# Altium PCB PowerElec.PcbDoc
Units mm, origin at the board's own origin, x right, y up, seen from the top; angles counter-clockwise.
Board outline 178 x 73 mm, 4 copper layers (Top Layer, GND, PWR, Bottom Layer), stack 0.603 mm thick; 119 components, 49 nets, 414 pads, 12 vias.
Unrouted connection lines stored in the file: 339.
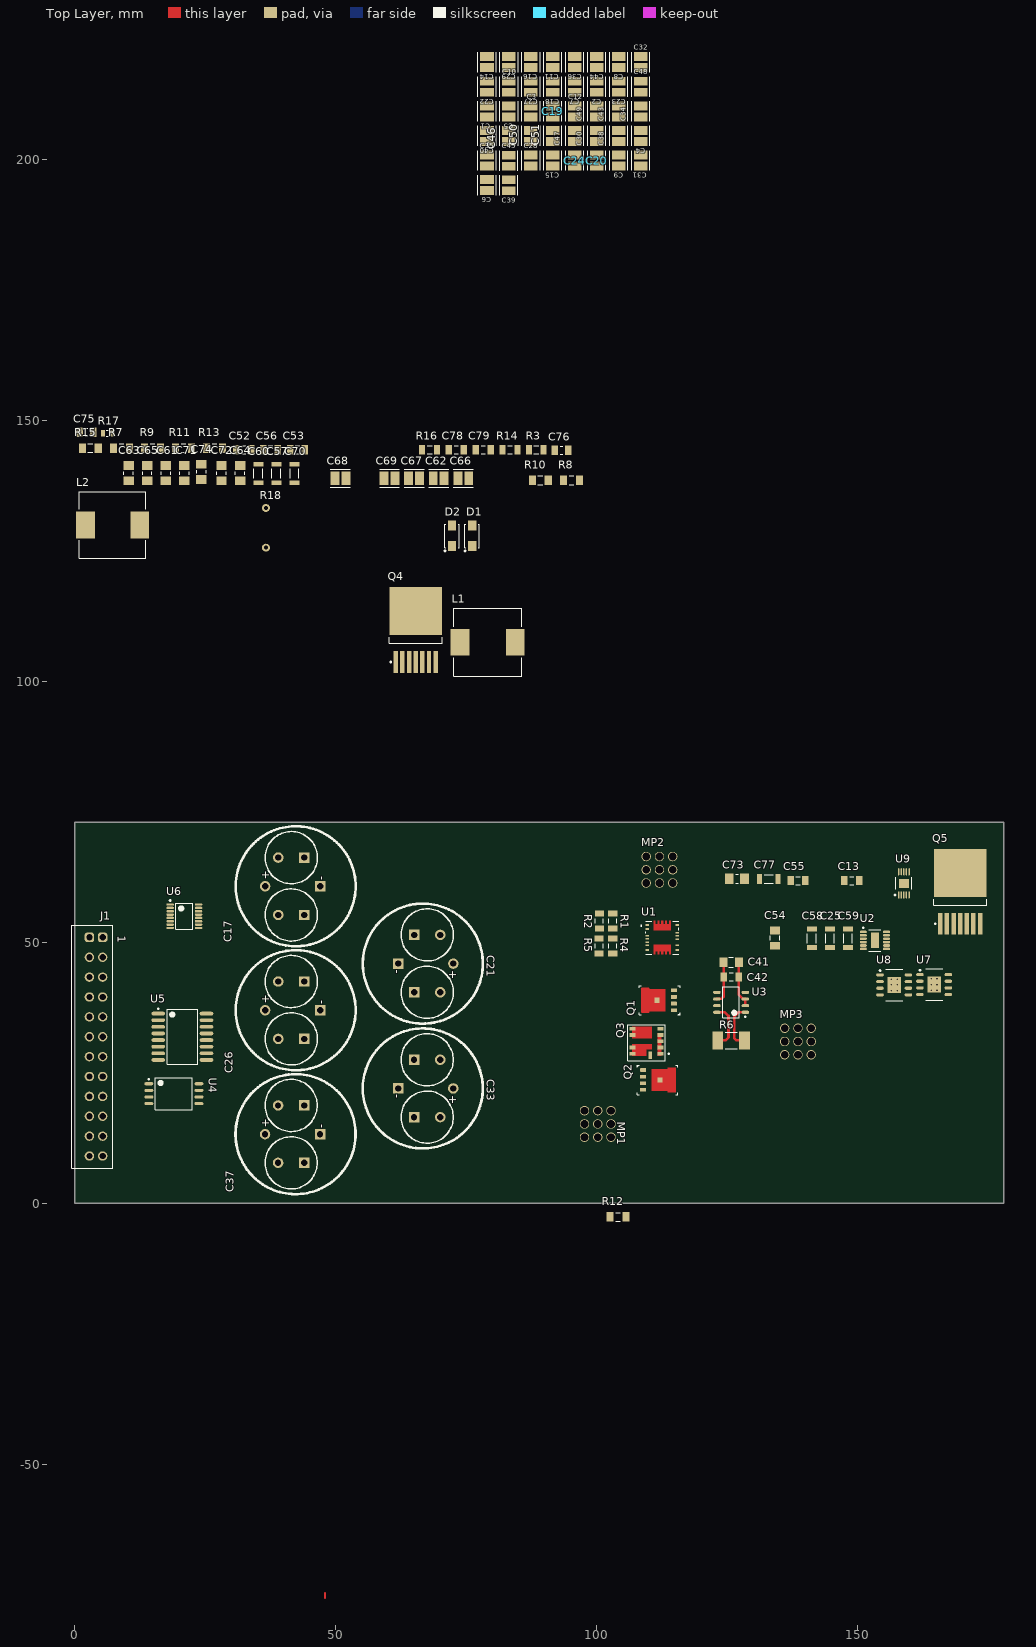
[diagram p0: Top Layer view]
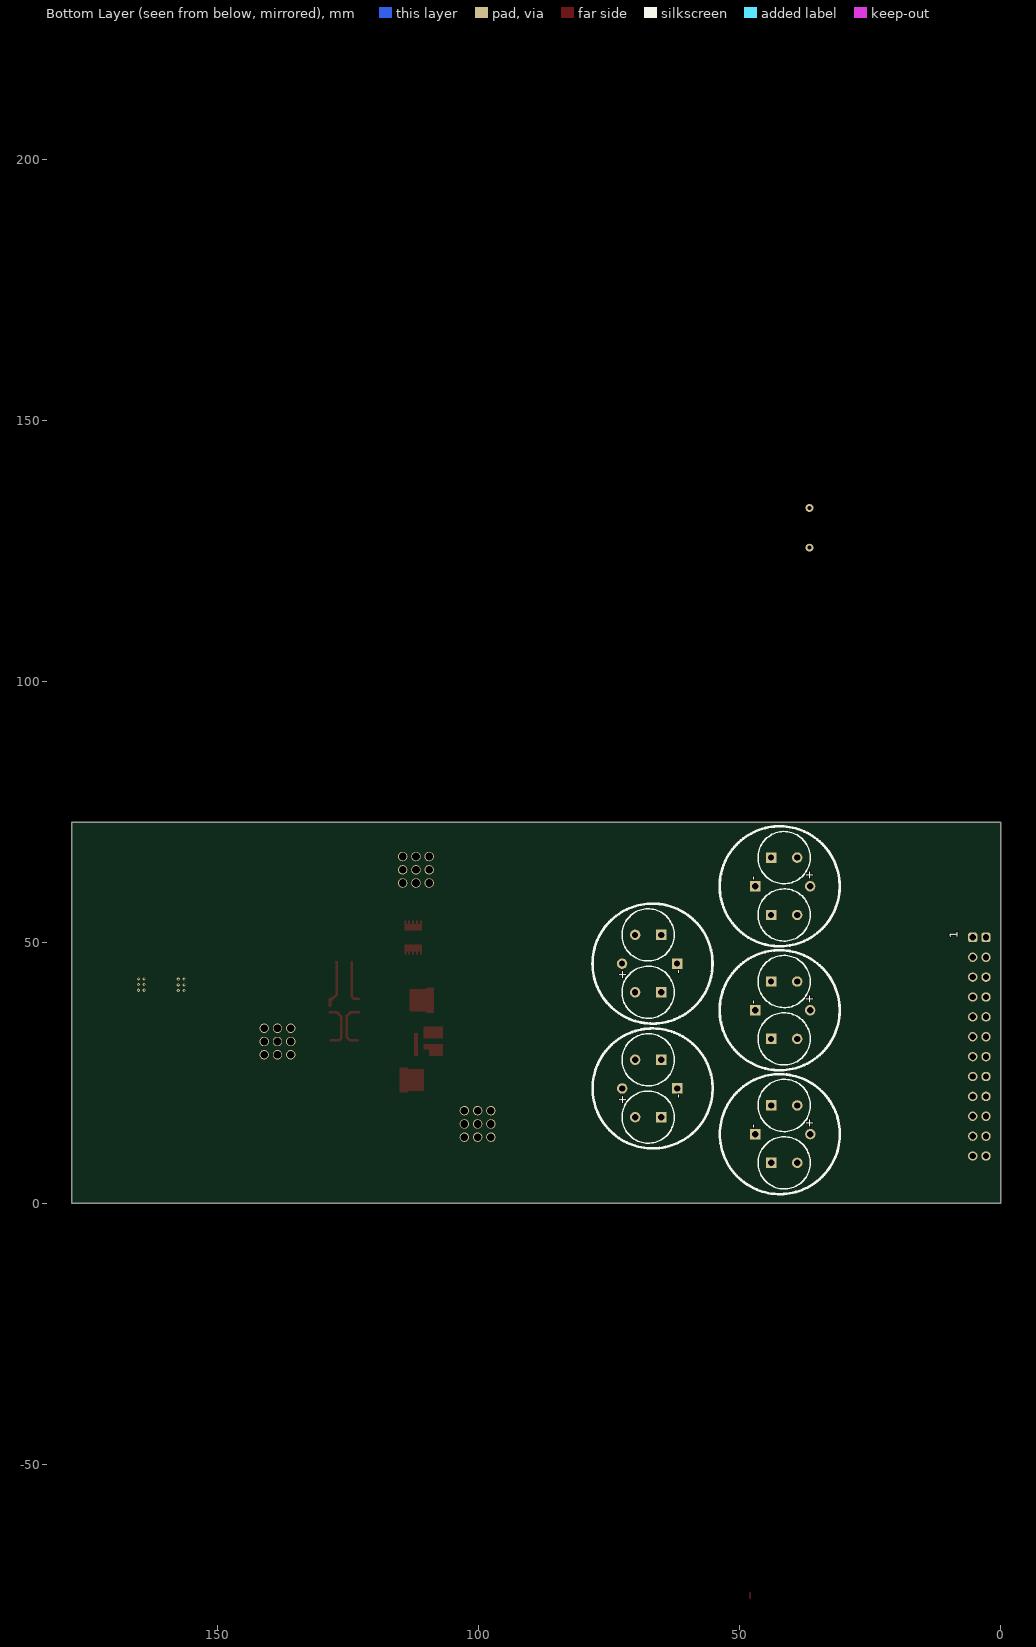
[diagram p1: Bottom Layer view, seen from below]

## Layer stack, top to bottom
Top Solder: solder mask 0.0102, Solder Resist, Dk 3.5
Top Layer: signal copper 0.0356
Dielectric 2: prepreg 0.0711, PP-006, Dk 4.1
GND: signal copper 0.035
Dielectric 1: dielectric 0.32, FR-4, Dk 4.8
PWR: signal copper 0.035
Dielectric 3: prepreg 0.0711, PP-006, Dk 4.1
Bottom Layer: signal copper 0.0356
Bottom Solder: solder mask 0.0102, Solder Resist, Dk 3.5

## Board outline
0,0 0,73 178,73 178,0

## Design rules (kind name [scope] priority, off if disabled: settings)
Clearance [All] p1: gap=0.254 ignorepadtopadclearanceinfootprint=FALSE
PlaneConnect [All] p1: planeconnectstyle=Direct reliefexpansion=0.508 reliefentries=4 reliefconductorwidth=0.254 reliefairgap=0.254
PolygonConnect [All] p1: connectstyle=Direct reliefconductorwidth=0.254 reliefentries=4 polygonreliefangle="90 Angle" airgapwidth=0.254
RoutingVias [All] p1: holewidth=0.711 width=1.27 viastyle="Through Hole" minholewidth=0.711 minwidth=1.27 maxholewidth=0.711 maxwidth=1.27
SolderMaskExpansion [All] p1: expansion=0.102 istentingtop=FALSE
SupplyNets "Schematic Supply Nets_4" [InNet('+11V')] p1: voltage=0.000
SupplyNets "Schematic Supply Nets_9" [InNet('P_IN')] p2: voltage=0.000
SupplyNets "Schematic Supply Nets_7" [InNet('GND ISO')] p3: voltage=0.000
SupplyNets "Schematic Supply Nets_6" [InNet('DGND')] p4: voltage=0.000
SupplyNets "Schematic Supply Nets_5" [InNet('+3V3 ISO')] p5: voltage=0.000
SupplyNets "Schematic Supply Nets_3" [InNet('+3V3')] p6: voltage=0.000
SupplyNets "Schematic Supply Nets_1" [InNet('AGND')] p7: voltage=0.000
SupplyNets "Schematic Supply Nets" [InNet('VBat')] p8: voltage=0.000
Width [All] p1: maxlimit=1 minlimit=0.254 preferedwidth=0.5
29 further rules are at their usual default settings.

## Classes and differential pairs
component class Isolation: C52 C53 C54 C55 C56 C57 C58 C59 C60 R9 R11 R14 R16 R17 U4 U5 U6
component class "Soft Start": C78 C79 D2 Q5 R18 U9
component class "Power Supply": C61 C62 C63 C64 C66 C67 C69 C70 C71 C72 C73 C74 C77 L1 L2 R15 R16 R17 R18 U7 U8
component class "Power Stage": C1 C2 C3 C4 C5 C6 C7 C8 C9 C10 C11 C12 C13 C14 C15 C16 C17 C18 C19 C20 C21 C22 C23 C24 C25 C26 C27 C28 C29 C30 C31 C32 C33 C34 C35 C36 C37 C38 C39 C40 C41 C42 C43 C44 C45 C46 C47 C48 C49 C50 C51 D1 Q1 Q2 Q3 R11 R14 U2 U3
component class PE: J1 MP1 MP2 MP3 R9 R11 R14 R16 U1

## Components (designator, comment, footprint, x,y, rotation, side; value= is the part's Value field where it differs from the comment)
C1 "GCM32EC71H106KA03L" FP-GCM32E-0_3-IPC_C 79.004,209.266 r90 top value=10µF
C2 "GCM32EC71H106KA03L" FP-GCM32E-0_3-IPC_C 100.044,213.978 r90 top value=10µF
C3 "GCM32EC71H106KA03L" FP-GCM32E-0_3-IPC_C 87.42,209.266 r90 top value=10µF
C4 "GCM32EC71H106KA03L" FP-GCM32E-0_3-IPC_C 108.46,204.553 r90 top value=10µF
C5 "GCM32EC71H106KA03L" FP-GCM32E-0_3-IPC_C 83.212,209.266 r90 top value=10µF
C6 "GCM32EC71H106KA03L" FP-GCM32E-0_3-IPC_C 79.004,195.129 r90 top value=10µF
C7 "GCM32EC71H106KA03L" FP-GCM32E-0_3-IPC_C 95.836,213.978 r90 top value=10µF
C8 "GCM32EC71H106KA03L" FP-GCM32E-0_3-IPC_C 104.252,218.69 r90 top value=10µF
C9 "GCM32EC71H106KA03L" FP-GCM32E-0_3-IPC_C 104.252,199.841 r270 top value=10µF
C10 "GCM32EC71H106KA03L" FP-GCM32E-0_3-IPC_C 83.212,213.978 r90 top value=10µF
C11 "GCM32EC71H106KA03L" FP-GCM32E-0_3-IPC_C 91.628,218.69 r90 top value=10µF
C12 "GCM32EC71H106KA03L" FP-GCM32E-0_3-IPC_C 95.836,209.266 r90 top value=10µF
C13 "C1206C104K1RACTU" CAPC3216X06N 148.926,61.841 r0 top value=100nF
C14 "GCM32EC71H106KA03L" FP-GCM32E-0_3-IPC_C 79.004,218.69 r90 top value=10µF
C15 "GCM32EC71H106KA03L" FP-GCM32E-0_3-IPC_C 91.628,199.841 r90 top value=10µF
C16 "GCM32EC71H106KA03L" FP-GCM32E-0_3-IPC_C 87.42,218.69 r90 top value=10µF
C17 "UVR1J472MRD" UVR1J472MRD-Footprint-1 36.5,60.745 r90 top value=4.7mF
C18 "GCM32EC71H106KA03L" FP-GCM32E-0_3-IPC_C 91.628,213.978 r90 top value=10µF
C19 "GCM32EC71H106KA03L" FP-GCM32E-0_3-IPC_C 91.628,209.266 r90 top value=10µF
C20 "GCM32EC71H106KA03L" FP-GCM32E-0_3-IPC_C 100.044,199.841 r270 top value=10µF
C21 "UVR1J472MRD" UVR1J472MRD-Footprint-1 72.556,45.927 r270 top value=4.7mF
C22 "GCM32EC71H106KA03L" FP-GCM32E-0_3-IPC_C 79.004,213.978 r90 top value=10µF
C23 "GCM32EC71H106KA03L" FP-GCM32E-0_3-IPC_C 104.252,213.978 r90 top value=10µF
C24 "GCM32EC71H106KA03L" FP-GCM32E-0_3-IPC_C 95.836,199.841 r270 top value=10µF
C25 "CL31B105KBHNNNE" CAPC3216X180X20ML20 144.738,50.771 r90 top value=1µF
C26 "UVR1J472MRD" UVR1J472MRD-Footprint-1 36.501,36.991 r90 top value=4.7mF
C27 "GCM32EC71H106KA03L" FP-GCM32E-0_3-IPC_C 87.42,213.978 r90 top value=10µF
C28 "GCM32EC71H106KA03L" FP-GCM32E-0_3-IPC_C 87.42,199.841 r90 top value=10µF
C29 "GCM32EC71H106KA03L" FP-GCM32E-0_3-IPC_C 83.212,218.69 r90 top value=10µF
C30 "GCM32EC71H106KA03L" FP-GCM32E-0_3-IPC_C 100.044,204.553 r90 top value=10µF
C31 "GCM32EC71H106KA03L" FP-GCM32E-0_3-IPC_C 108.46,199.841 r90 top value=10µF
C32 "GCM32EC71H106KA03L" FP-GCM32E-0_3-IPC_C 108.46,218.69 r90 top value=10µF
C33 "UVR1J472MRD" UVR1J472MRD-Footprint-1 72.541,22 r270 top value=4.7mF
C34 "GCM32EC71H106KA03L" FP-GCM32E-0_3-IPC_C 108.46,209.266 r90 top value=10µF
C35 "GCM32EC71H106KA03L" FP-GCM32E-0_3-IPC_C 79.004,199.841 r90 top value=10µF
C36 "GCM32EC71H106KA03L" FP-GCM32E-0_3-IPC_C 95.836,218.69 r90 top value=10µF
C37 "UVR1J472MRD" UVR1J472MRD-Footprint-1 36.472,13.237 r90 top value=4.7mF
C38 "GCM32EC71H106KA03L" FP-GCM32E-0_3-IPC_C 104.252,204.553 r90 top value=10µF
C39 "GCM32EC71H106KA03L" FP-GCM32E-0_3-IPC_C 83.2,195.1 r270 top value=10µF
C40 "GCM32EC71H106KA03L" FP-GCM32E-0_3-IPC_C 79.004,204.553 r90 top value=10µF
C41 "CL31B102KGFNNNE" FP-CL31-IPC_A 125.8,46.2 r0 top value=1nF
C42 "C1206C104K1RACTU" CAPC3216X06N 125.8,43.367 r0 top value=100nF
C43 "GCM32EC71H106KA03L" FP-GCM32E-0_3-IPC_C 104.252,209.266 r90 top value=10µF
C44 "GCM32EC71H106KA03L" FP-GCM32E-0_3-IPC_C 100.044,218.69 r90 top value=10µF
C45 "GCM32EC71H106KA03L" FP-GCM32E-0_3-IPC_C 83.2,199.8 r270 top value=10µF
C46 "GCM32EC71H106KA03L" FP-GCM32E-0_3-IPC_C 83.212,204.553 r90 top value=10µF
C47 "GCM32EC71H106KA03L" FP-GCM32E-0_3-IPC_C 95.836,204.553 r90 top value=10µF
C48 "GCM32EC71H106KA03L" FP-GCM32E-0_3-IPC_C 108.46,213.978 r90 top value=10µF
C49 "GCM32EC71H106KA03L" FP-GCM32E-0_3-IPC_C 100.044,209.266 r90 top value=10µF
C50 "GCM32EC71H106KA03L" FP-GCM32E-0_3-IPC_C 87.42,204.553 r90 top value=10µF
C51 "GCM32EC71H106KA03L" FP-GCM32E-0_3-IPC_C 91.628,204.553 r90 top value=10µF
C52 "C1206C104K1RACTU" CAPC3216X06N 32.369,144.411 r0 top value=100nF
C53 "C1206C104K1RACTU" CAPC3216X06N 42.685,144.411 r0 top value=100nF
C54 "CL31B102KGFNNNE" FP-CL31-IPC_A 134.202,50.825 r90 top value=1nF
C55 "C1206C104K1RACTU" CAPC3216X06N 138.61,61.841 r0 top value=100nF
C56 "C1206C104K1RACTU" CAPC3216X06N 37.527,144.411 r0 top value=100nF
C57 "CL31B105KBHNNNE" CAPC3216X180X20ML20 38.651,139.853 r90 top value=1µF
C58 "CL31B105KBHNNNE" CAPC3216X180X20ML20 141.28,50.771 r90 top value=1µF
C59 "CL31B105KBHNNNE" CAPC3216X180X20ML20 148.196,50.771 r90 top value=1µF
C60 "CL31B105KBHNNNE" CAPC3216X180X20ML20 35.193,139.853 r90 top value=1µF
C61 "CL31B104KBCNNNC" CAPC3216X190X55ML30T25 17.453,139.903 r90 top value=100nF
C62 "GCM32EC71H106KA03L" FP-GCM32E-0_3-IPC_C 69.755,138.928 r0 top value=10µF
C63 "CL31B104KBCNNNC" CAPC3216X190X55ML30T25 10.337,139.903 r90 top value=100nF
C64 "CL31B104KBCNNNC" CAPC3216X190X55ML30T25 31.685,139.903 r90 top value=100nF
C65 "CL31B104KBCNNNC" CAPC3216X190X55ML30T25 13.895,139.903 r90 top value=100nF
C66 "GCM32EC71H106KA03L" FP-GCM32E-0_3-IPC_C 74.467,138.928 r0 top value=10µF
C67 "GCM32EC71H106KA03L" FP-GCM32E-0_3-IPC_C 65.043,138.928 r0 top value=10µF
C68 "GCM32EC71H106KA03L" FP-GCM32E-0_3-IPC_C 50.906,138.928 r0 top value=10µF
C69 "GCM32EC71H106KA03L" FP-GCM32E-0_3-IPC_C 60.331,138.928 r0 top value=10µF
C70 "CL31B105KBHNNNE" CAPC3216X180X20ML20 42.109,139.853 r90 top value=1µF
C71 "CL31B104KBCNNNC" CAPC3216X190X55ML30T25 21.011,139.903 r90 top value=100nF
C72 "CL31B104KBCNNNC" CAPC3216X190X55ML30T25 28.127,139.903 r90 top value=100nF
C73 "CL31B104KBCNNNC" CAPC3216X190X55ML30T25 126.894,62.191 r0 top value=100nF
C74 "CL31B104KBCNNNC" CAPC3216X190X55ML30T25 24.265,140.181 r90 top value=100nF
C75 "CL31A476MPHNNNE" CAPC3216X190X55LL30T25 2.279,147.769 r0 top value=47µF
C76 "CL31A476MPHNNNE" CAPC3216X190X55LL30T25 93.265,144.311 r0 top value=47µF
C77 "CL31B105KBHNNNE" CAPC3216X180X20ML20 133.002,62.141 r0 top value=1µF
C78 "C1206C104K1RACTU" CAPC3216X06N 73.133,144.411 r0 top value=100nF
C79 "C1206C104K1RACTU" CAPC3216X06N 78.291,144.411 r0 top value=100nF
D1 "SS210" DIOM4226X24N 76.161,127.92 r90 top
D2 "SS210" DIOM4226X24N 72.303,127.92 r90 top
J1 "691309310012" 691309310012 0,30 r270 top
L1 "SRR1208-220ML" INDP127127X85N 79.136,107.537 r0 top value=22µH
L2 "SRR1260A-5R6Y" INDP125125X60N 7.252,130 r0 top value=5.6µH
MP1 "7461001" "7461001_chemical surface" 100.24,15.2 r0 top
MP2 "7461001" "7461001_chemical surface" 112.06,63.9 r0 top
MP3 "7461001" "7461001_chemical surface" 138.6,31 r0 top
Q1 "PSMN1R0-30YLDX" NXP-SOT669_L 114.894,36.995 r180 top
Q2 "PSMN1R0-30YLDX" NXP-SOT669_L 108.868,25.526 r0 top
Q3 "ISG0613N04NM6H" IFX-PG-VITFN-10-1-V 109.6,30.9 r180 top
Q4 "IPB014N06NATMA1" INF-PG-TO263-7-1_M 65.349,109.865 r90 top
Q5 "IPB014N06NATMA1" INF-PG-TO263-7-1_M 169.7,59.7 r90 top
R1 "1206W4F0000T5E" RESC3216X60X45NL15T20 103.1,54.079 r90 top value=0
R2 "1206W4F0000T5E" RESC3216X60X45NL15T20 100.546,54.079 r90 top value=0
R3 "1206W4F0000T5E" RESC3216X60X45NL15T20 88.457,144.411 r0 top value=0
R4 "1206W4F0000T5E" RESC3216X60X45NL15T20 103.1,49.3 r90 top value=0
R5 "1206W4F0000T5E" RESC3216X60X45NL15T20 100.5,49.3 r90 top value=0
R6 "CHSA2512R0010F" RESC6331X09N 125.8,31.2 r0 top value=1m
R7 "1206W4F1002T5E" RESC3216X60X45ML15T20 8.937,144.711 r0 top value=10k
R8 "1206W4F1002T5E" RESC3216X60X45ML15T20 95.184,138.553 r0 top value=10k
R9 "1206W4F1002T5E" RESC3216X60X45ML15T20 14.895,144.711 r0 top value=10k
R10 "1206W4F1002T5E" RESC3216X60X45ML15T20 89.226,138.553 r0 top value=10k
R11 "1206W4F1002T5E" RESC3216X60X45ML15T20 20.853,144.711 r0 top value=10k
R12 "1206W4F1002T5E" RESC3216X60X45ML15T20 104.1,-2.604 r0 top value=10k
R13 "1206W4F1002T5E" RESC3216X60X45ML15T20 26.811,144.711 r0 top value=10k
R14 "1206W4F1003T5E" RESC3216X60X45NL15T20 83.399,144.411 r0 top value=100k
R15 "1206W4F1002T5E" RESC3216X60X45ML15T20 2.979,144.711 r0 top value=10k
R16 "1206W4F1003T5E" RESC3216X60X45NL15T20 68.025,144.411 r0 top value=100k
R17 "0805W8F4302T5E" RESC0805(2012)_L 6.337,147.569 r0 top value=43k
R18 "RS2B-10 OHM-5%" "RS2B-10 OHM-5%-Footprint-1" 36.642,125.634 r0 top value=10
U1 "INA780BIDEKR" VQFN15_DEK_TEX 112.6,50.9 r0 top
U2 "LTC7063RMSE#PBF" TSOP65P490X110_HS-13N 153.354,50.371 r0 top
U3 "AD8411AWBRZ" SOIC127P600X175-8N 125.8,38.5 r180 top
U4 "ADUM1252AWA+" SOIC127P1030X265-8N 19,21 r0 top
U5 "ADUM1411BRWZ" ADI-RW-16_M 20.625,31.905 r0 top
U6 "ADUM3190BRQZ" SOP64P600X175-16N 21,55 r0 top
U7 "LMR33630ADDAR" SOIC127P600X170_HS-9N 164.708,41.907 r0 top
U8 "LMR33630ADDAR" SOIC127P600X170_HS-9N 157.054,41.845 r0 top
U9 "LTC7004EMSE#PBF" TSSOP50P490X110_HS-11N 158.9,61.3 r90 top

## Footprints (in the part's own frame and the unit in brackets; to place one, negate y for a bottom-side part, rotate by r counter-clockwise, add the part's x,y. Pads: shape width x height; smd on the part's side, far side on the other; paste and mask are expansions set on the pad)
"7461001_chemical surface" [mm] "M5, thread 8mm"
  round 1.8 hole 1.475: 1(-2.54,-2.54) 1(-2.54,0) 1(-2.54,2.54) 1(0,-2.54) 1(0,0) 1(0,2.54) 1(2.54,-2.54) 1(2.54,0) 1(2.54,2.54)
  body extent -3.5,-3.5 3.5,3.5, height 12
691309310012 [mm] "Horizontal Reserved PCB Header, pitch 3.81mm, 12p"
  rrect50% 1.8x1.8 hole 1.2: 1A(-20.955,5.35) 1B(-20.955,2.81)
  round 1.8 hole 1.2: 2A(-17.145,5.35) 2B(-17.145,2.81) 3A(-13.335,5.35) 3B(-13.335,2.81) 4A(-9.525,5.35) 4B(-9.525,2.81) 5A(-5.715,5.35) 5B(-5.715,2.81) 6A(-1.905,5.35) 6B(-1.905,2.81) 7A(1.905,5.35) 7B(1.905,2.81) 8A(5.715,5.35) 8B(5.715,2.81) 9A(9.525,5.35) 9B(9.525,2.81) 10A(13.335,5.35) 10B(13.335,2.81) 11A(17.145,5.35) 11B(17.145,2.81) 12A(20.955,5.35) 12B(20.955,2.81)
  silkscreen extent -23.26,-0.55 23.26,7.25, body extent -23.01,-7.25 23.5,7.25, height 6.85
ADI-RW-16_M [mm] "SOIC, 16-Leads, Body 10.3x7.5mm, Pitch 1.27mm, IPC Low Density"
  oval 2.6x0.7 smd: 1(-4.625,4.445) 2(-4.625,3.175) 3(-4.625,1.905) 4(-4.625,0.635) 5(-4.625,-0.635) 6(-4.625,-1.905) 7(-4.625,-3.175) 8(-4.625,-4.445) 9(4.625,-4.445) 10(4.625,-3.175) 11(4.625,-1.905) 12(4.625,-0.635) 13(4.625,0.635) 14(4.625,1.905) 15(4.625,3.175) 16(4.625,4.445)
  silkscreen extent -4.75,-5.25 2.93,5.47, body extent -3.8,-5.25 3.8,5.25, height 2.65
CAPC3216X06N [mm] "Chip Capacitor, 2-Leads, Body 3.20x1.60mm, IPC Medium Density"
  rect 1.25x1.75 smd: 1(-1.425,0) 2(1.425,0)
  silkscreen extent -0.4,-0.77 0.4,0.77, body extent -1.65,-0.85 1.65,0.85, height 0.6
CAPC3216X180X20ML20 [mm] "Chip Capacitor, 2-Leads, Body 3.40x1.80mm, IPC Low Density"
  rect 0.95x1.9 smd: 1(-1.775,0) 2(1.775,0)
  silkscreen extent -0.9,-0.85 0.9,0.85, body extent -1.7,-0.9 1.7,0.9, height 1.8
CAPC3216X190X55LL30T25 [mm] "Chip Capacitor, 2-Leads, Body 3.5x1.9mm, IPC High Density"
  rect 1.25x1.8 smd: 1(-1.275,0) 2(1.275,0)
  silkscreen extent -0.25,-0.8 0.25,0.8, body extent -1.75,-0.95 1.75,0.95, height 1.9
CAPC3216X190X55ML30T25 [mm] "Chip Capacitor, 2-Leads, Body 3.5x1.9mm, IPC Low Density"
  rect 1.65x2 smd: 1(-1.475,0) 2(1.475,0)
  silkscreen extent -0.25,-0.9 0.25,0.9, body extent -1.75,-0.95 1.75,0.95, height 1.9
DIOM4226X24N [mm] "Molded Diode, 2-Leads, Body 4.15x2.55mm, IPC Medium Density"
  rect 2x1.6 smd: 1(-1.965,0) 2(1.965,0)
  silkscreen extent -3.02,-1.4 2.25,1.47, body extent -2.47,-1.4 2.47,1.4, height 2.44
FP-CL31-IPC_A [mm]
  rect 1.505x1.858 smd paste+0 mask+0: 1(-1.476,0) 2(1.476,0)
  silkscreen extent -0.42,-0.93 0.42,0.93, body extent -2.73,-1.43 2.73,1.43, height 0.25
FP-GCM32E-0_3-IPC_C [mm]
  rect 1.703x2.606 smd paste+0 mask+0: 1(-1.051,0) 2(1.051,0)
  silkscreen extent -1.9,-1.75 1.9,1.75, body extent -2,-1.45 2,1.45, height 0.25
IFX-PG-VITFN-10-1-V [mm] "PG-VITFN-10-1, SMD, 1.20 mm pitch, 10 pin, 6.00 mm L X 6.30 mm W X 1.00 mm H body"
  rect 1.15x0.7 smd paste-0.575 mask+0: 1(-2.675,2.25) 2(-2.675,1.05) 3(-2.675,-0.15) 4(-2.675,-1.35) 5(-2.675,-2.55) 6(2.675,-2.55) 7(2.675,-1.35) 8(2.675,1.05) 9(2.675,2.25)
  rect 0.6x1.4 smd paste-0.06 mask+0: 10(-0.7,2.55)
  Top Layer region: -2.8,-1.7 -2.1,-1.7 -2.1,2.6 -2.8,2.6
  Top Layer region: -1,-2.9 2.705,-2.9 2.705,-0.7 -1,-0.7
  Top Layer region: -1,0.4 2.705,0.4 2.705,2.6 0.085,2.6 0.085,1.4 -1,1.4
  silkscreen extent -4.38,-3.3 3.6,3.6, body extent -3,-3.3 3,3, height 1
INDP125125X60N [mm] "Precision Wire Wound Inductor, 2-Leads, Body 12.50x12.50mm, IPC Medium Density"
  rect 3.6x5.15 smd: 1(-5.2,0) 2(5.2,0)
  silkscreen extent -6.4,-6.4 6.4,6.4, body extent -6.35,-6.25 6.35,6.25, height 6.1
INDP127127X85N [mm] "Precision Wire Wound Inductor, 2-Leads, Body 12.70x12.70mm, IPC Medium Density"
  rect 3.6x5.1 smd: 1(-5.3,0) 2(5.3,0)
  silkscreen extent -6.5,-6.5 6.5,6.5, body extent -6.45,-6.35 6.45,6.35, height 8.6
INF-PG-TO263-7-1_M [mm] "DPAK, 8-Leads, Body 10x9.25mm, Pitch 1.27mm, IPC Low Density"
  rect 4.15x0.85 smd: 1(-6.15,3.81) 2(-6.15,2.54) 3(-6.15,1.27) 4(-6.15,0) 5(-6.15,-1.27) 6(-6.15,-2.54) 7(-6.15,-3.81)
  rect 9.2x10.1 smd: 8(3.6,0)
  silkscreen extent -6.27,-5.1 -1.4,5.1, body extent -2.55,-5.1 6.9,5.1, height 4.4
NXP-SOT669_L [mm] "DPAK, 4-Leads, Body 5x4.1mm, Pitch 1.27mm, IPC High Density"
  rrect25% 1.15x0.7 smd: 1(0.069,0) 2(0.069,-1.27) 3(0.069,-2.54) 4(0.069,-3.81)
  rrect0% 1x1 smd paste-1: 5(3.294,-1.905)
  Top Layer region: 1.694,0.095 1.694,-3.905 1.694,-3.925 1.709,-3.962 1.737,-3.99 1.774,-4.005 1.794,-4.005 1.794,-4.005 4.694,-4.005 4.713,-4.007 4.75,-4.022 4.777,-4.049 4.792,-4.085 4.794,-4.105 4.794,-4.105 4.794,-4.155 4.794,-4.175 4.809,-4.212 4.837,-4.24 4.874,-4.255 4.894,-4.255 4.894,-4.255 6.194,-4.255 6.214,-4.255 6.251,-4.24 6.279,-4.212 6.294,-4.175 6.294,-4.155 6.294,-4.155 6.294,0.345 6.294,0.365 6.279,0.402 6.251,0.43 6.214,0.445 6.194,0.445 6.194,0.445 4.894,0.445 4.874,0.445 4.837,0.43 4.809,0.402 4.794,0.365 4.794,0.345 4.794,0.345 4.794,0.295 4.792,0.275 4.777,0.239 4.75,0.212 4.714,0.197 4.694,0.195 4.694,0.195 1.794,0.195 1.774,0.195 1.737,0.18 1.709,0.152 1.694,0.115 1.694,0.095
  silkscreen extent -1.11,-4.7 6.69,0.89, body extent -0.43,-4.35 5.99,0.55, height 1.1
RESC0805(2012)_L [mm] "Chip Resistor, Body 2.0x1.3mm, IPC High Density"
  rrect25% 0.76x1.3 smd: 1(-0.9,0) 2(0.89,0)
  silkscreen extent -0.3,-0.55 0.3,0.55, body extent -1,-0.62 1,0.63, height 0.6
RESC3216X60X45ML15T20 [mm] "Chip Resistor, 2-Leads, Body 3.3x1.75mm, IPC Low Density"
  rect 1.35x1.85 smd: 1(-1.525,0) 2(1.525,0)
  silkscreen extent -0.45,-0.82 0.45,0.82, body extent -1.65,-0.87 1.65,0.87, height 0.6
RESC3216X60X45NL15T20 [mm] "Chip Resistor, 2-Leads, Body 3.3x1.75mm, IPC Medium Density"
  rect 1.15x1.75 smd: 1(-1.425,0) 2(1.425,0)
  silkscreen extent -0.45,-0.77 0.45,0.77, body extent -1.65,-0.87 1.65,0.87, height 0.6
RESC6331X09N [mm] "Chip Resistor, 2-Leads, Body 6.30x3.10mm, IPC Medium Density"
  rect 2.05x3.4 smd: 1(-2.575,0) 2(2.575,0)
  silkscreen extent -1.15,-1.6 1.15,1.6, body extent -3.17,-1.58 3.32,1.52, height 0.92
"RS2B-10 OHM-5%-Footprint-1" [mil]
  round 60 hole 30: 1(0,0) 2(0,300)
SOIC127P600X170_HS-9N [mm] "SOIC, 8-Leads, Body 5.40x3.90mm, Pitch 1.27mm, Thermal Pad 3.10x2.60mm, IPC Medium Density"
  oval 1.45x0.6 smd: 1(-2.725,1.905) 2(-2.725,0.635) 3(-2.725,-0.635) 4(-2.725,-1.905) 5(2.725,-1.905) 6(2.725,-0.635) 7(2.725,0.635) 8(2.725,1.905)
  rect 2.6x3.1 smd: 9(0,0)
  silkscreen extent -2.85,-3 1.6,3, body extent -3,-3 3,3, height 1.7
SOIC127P600X175-8N [mm] "SOIC, 8-Leads, Body 5.40x3.90mm, Pitch 1.27mm, IPC Medium Density"
  oval 1.45x0.6 smd: 1(-2.725,1.905) 2(-2.725,0.635) 3(-2.725,-0.635) 4(-2.725,-1.905) 5(2.725,-1.905) 6(2.725,-0.635) 7(2.725,0.635) 8(2.725,1.905)
  silkscreen extent -2.85,-3 1.6,3, body extent -3,-3 3,3, height 1.75
SOIC127P1030X265-8N [mm] "SOIC, 8-Leads, Body 5.85x7.50mm, Pitch 1.27mm, IPC Medium Density"
  oval 1.7x0.6 smd: 1(-4.8,1.905) 2(-4.8,0.635) 3(-4.8,-0.635) 4(-4.8,-1.905) 5(4.8,-1.905) 6(4.8,-0.635) 7(4.8,0.635) 8(4.8,1.905)
  silkscreen extent -4.92,-3.05 3.55,3.05, body extent -5.16,-3.05 5.16,3.05, height 2.65
SOP64P600X175-16N [mm] "SOP, 16-Leads, Body 4.90x3.91mm, Pitch 0.64mm, IPC Medium Density"
  oval 1.45x0.45 smd: 1(-2.725,2.24) 2(-2.725,1.6) 3(-2.725,0.96) 4(-2.725,0.32) 5(-2.725,-0.32) 6(-2.725,-0.96) 7(-2.725,-1.6) 8(-2.725,-2.24) 9(2.725,-2.24) 10(2.725,-1.6) 11(2.725,-0.96) 12(2.725,-0.32) 13(2.725,0.32) 14(2.725,0.96) 15(2.725,1.6) 16(2.725,2.24)
  silkscreen extent -2.85,-2.5 1.6,3.14, body extent -3,-2.5 3,2.5, height 1.75
TSOP65P490X110_HS-13N [mm] "TSOP, 12-Leads, Body 4.04x3.00mm, Pitch 0.65mm, Thermal Pad 2.95x1.55mm, IPC Medium Density"
  oval 1.35x0.5 smd: 1(-2.225,1.625) 2(-2.225,0.975) 3(-2.225,0.325) 4(-2.225,-0.325) 5(-2.225,-0.975) 6(-2.225,-1.625) 7(2.225,-1.625) 8(2.225,-0.975) 9(2.225,-0.325) 10(2.225,0.325) 11(2.225,0.975) 12(2.225,1.625)
  rect 1.55x2.95 smd: 13(0,0)
  silkscreen extent -2.35,-2.05 1.15,2.55, body extent -2.45,-2.05 2.45,2.05, height 1.1
TSSOP50P490X110_HS-11N [mm] "TSSOP, 10-Leads, Body 3.00x3.00mm, Pitch 0.50mm, Thermal Pad 1.88x1.68mm, IPC Medium Density"
  oval 1.35x0.3 smd: 1(-2.225,1) 2(-2.225,0.5) 3(-2.225,0) 4(-2.225,-0.5) 5(-2.225,-1) 6(2.225,-1) 7(2.225,-0.5) 8(2.225,0) 9(2.225,0.5) 10(2.225,1)
  rect 1.68x1.88 smd: 11(0,0)
  silkscreen extent -2.35,-1.55 1.15,1.82, body extent -2.45,-1.55 2.45,1.55, height 1.1
UVR1J472MRD-Footprint-1 [mm]
  round 2 hole 1.2: 1(-5.5,-2.5) 1(0,0) 1(5.5,-2.5)
  rect 2x2 hole 1.2: 2(-5.5,-7.5) 2(0,-10.541) 2(5.5,-7.5)
  silkscreen extent -11.5,-17.34 11.5,5.65, body extent -11.5,-17.5 11.5,5.5, height 50
VQFN15_DEK_TEX [mil]
  rect 28x16 smd paste+0 mask+0: 1(-112.2,94.49) 7(-112.2,-94.49) 9(112.2,-94.49) 14(112.2,94.49)
  rect 28x12 smd paste+0 mask+0: 2(-112.2,64.96) 3(-112.2,13.78) 4(-112.2,-9.84) 5(-112.2,-33.46) 6(-112.2,-57.09) 10(112.2,-57.09) 11(112.2,-11.81) 12(112.2,13.78) 13(112.2,37.4)
  round 1 smd: 8(0,-90.74) 15(0,90.74)
  Top Layer region: 0,-23.5 0,-23.5 0,-23.5 0,-23.5 0,-23.5 0,-23.5 0,-23.5 0,-23.5
  Top Layer region: 0,23.5 0,23.5 0,23.5 0,23.5 0,23.5 0,23.5 0,23.5 0,23.5
  Top Layer region: -53,126.24 -65,126.24 -65,55.24 65,55.24 65,126.24 53,126.24 53,102.24 35.53,102.24 35.53,126.24 23.53,126.24 23.53,102.24 6,102.24 6,126.24 -6,126.24 -6,102.24 -23.53,102.24 -23.53,126.24 -35.53,126.24 -35.53,102.24 -53,102.24
  Top Layer region: 65,-55.24 -65,-55.24 -65,-126.24 -53,-126.24 -53,-102.24 -35.53,-102.24 -35.53,-126.24 -23.53,-126.24 -23.53,-102.24 -6,-102.24 -6,-126.24 6,-126.24 6,-102.24 23.53,-102.24 23.53,-126.24 35.53,-126.24 35.53,-102.24 53,-102.24 53,-126.24 65,-126.24
  silkscreen extent -164,-125 125,125, body extent -118,-118 118,118, height 39

## Part data
C1 C2 C3 C4 C5 C6 C7 C8 C9 C10 C11 C12 C14 C15 C16 C18 C19 C20 C22 C23 C24 C27 C28 C29 C30 C31 C32 C34 C35 C36 C38 C39 C40 C43 C44 C45 C46 C47 C48 C49 C50 C51 C62 C66 C67 C68 C69: library part CMP-001-00085-1, "50V 10uF X7S ±10% 1210 Multilayer Ceramic Capacitors MLCC - SMD/SMT ROHS", Case Code (Metric)=3225, Case/Package=1210, Dielectric=X7S, Max Operating Temperature=125°C, Min Operating Temperature=-55°C, Tolerance=10%, Voltage Rating=50V, Mounting Technology="Surface Mount"
C13 C42 C52 C53 C55 C56 C78 C79: library part CMP-001-00083-1, "Ceramic Capacitor, Multilayer, Ceramic, 200V, 10% +Tol, 10% -Tol, X7R, 15% TC, 0.01uF, 1206", Case/Package=1206, Max Operating Temperature=125°C, Min Operating Temperature=-55°C, Tolerance=10%, Voltage Rating=100V, Mounting Technology="Surface Mount", Pins=2
C17 C21 C26 C33 C37: library part CMP-001-00084-4, "Radial Can ALUMINUM ELECTROLYTIC CAPACITOR UVR 63V 4700muF ±20% 0.866Dia 22.00mm", Case/Package=Radial, Max Operating Temperature=85°C, Min Operating Temperature=-40°C, Ripple Current=3.2A, Tolerance=20%, Voltage Rating=63V, Mounting Technology="Through Hole", Pins=2
C25 C57 C58 C59 C60 C70 C77: library part CMP-001-00086-1, "Ceramic Capacitor, Multilayer, Ceramic, 50V, 10% +Tol, 10% -Tol, X7R, +-15% TC, 1uF, Surface Mount, 1206 inch", Case/Package=1206, JLCPN=C1848, Max Operating Temperature=125°C, Min Operating Temperature=-55°C, Tolerance=10%, Voltage Rating=50V, Mounting Technology="Surface Mount"
C41 C54: library part CMP-001-00090-1, "Ceramic Capacitor, Multilayer, Ceramic, 500V, 10% +Tol, 10% -Tol, X7R, +-15% TC, 1nF, Surface Mount, 1206 inch", Case/Package=1206, Max Operating Temperature=125°C, Min Operating Temperature=-55°C, Tolerance=10%, Voltage Rating=500V, Mounting Technology="Surface Mount"
C61 C63 C64 C65 C71 C72 C73 C74: library part CMP-001-00089-1, "50V 100nF X7R ±10% 1206 Multilayer Ceramic Capacitors MLCC - SMD/SMT ROHS", Case/Package=1206, JLCPN=C24497, Max Operating Temperature=125°C, Min Operating Temperature=-55°C, Tolerance=10%, Voltage Rating=50V, Mounting Technology="Surface Mount"
C75 C76: library part CMP-001-00087-1, "Ceramic Capacitor, Multilayer, Ceramic, 10V, 20% +Tol, 20% -Tol, X5R, +-15% TC, 47uF, Surface Mount, 1206 inch", Case/Package=1206, JLCPN=C96123, Max Operating Temperature=85°C, Min Operating Temperature=-55°C, Tolerance=20%, Voltage Rating=10V, Mounting Technology="Surface Mount"
D1 D2: library part CMP-004-00033-2, "Rectifier Diode, Schottky, 1 Phase, 1 Element, 2A, 100V V(RRM), Silicon, DO-214AA", Case/Package=SMB, Forward Current=2A, Forward Voltage=850mV, JLCPN=C14996, Max Operating Temperature=150°C, Min Operating Temperature=-65°C, Pins=2
J1: library part CMP-002-00074-2, "Terminal Block, 3.81MM Pitch, Horizontal With Coding Finger, Tht, 12 Pins", Gender=Female, System=Connector
L1: library part CMP-006-00022-1, "Inductor Power Shielded Wirewound 22uH 20% 1KHz 23Q-Factor Ferrite 3.5A 0.043Ohm DCR T/R", Case/Package=5050, Current Rating=3.5A, JLCPN=C2041332, Max Operating Temperature=125°C, Min Operating Temperature=-40°C, Self Resonant Frequency=7MHz, Tolerance=20%, Max Current Rating=3.5A, Mounting Technology="Surface Mount", Pins=2
L2: library part CMP-006-00023-1, "Ind Power Shielded Wirewound 5.6uH 30% 100KHz 19Q-Factor Ferrite 6.7A T/R", Case/Package=Nonstandard, Current Rating=6.7A, DC Resistance (DCR)=16.2mΩ, JLCPN=C2042812, Max Operating Temperature=125°C, Min Operating Temperature=-40°C, Self Resonant Frequency=33MHz, Tolerance=30%, Max Current Rating=6.7A, Mounting Technology="Surface Mount"
MP1 MP2 MP3: library part CMP-002-00075-1, "Pcb Terminal, Brass, Press-Fit Rohs Compliant: Yes", Current Rating=130A, Max Operating Temperature=150°C, Min Operating Temperature=-55°C, Height=12mm, Material=Brass, Pins=9
Q1 Q2: library part CMP-013-00029-7, "N-channel Logic Level MOSFET, 30 V, 300 A, -55 to 175 degC, 5-Pin SOT669, RoHS, Tape and Reel", Pins=5, RoHS Compliant=True, Transistor Type=1N-Channel, Vgs (Max)=20V
Q3: library part CMP-007-000000-2, "Small Signal Dual N-Channel Enhancement Transistor, Pin 1 Source, 2 Source, 3 Drain, 4 Drain, 5 Gate, 6 Drain, 7 Drain, 8 Source, 9 Source 10 Gate, 10 Pins", Manufacturer="Infineon Technologies", Design Item ID=ISG0613N04NM6H, Manufacturer Order Number=ISG0613N04NM6H, PackageReference=PG-VITFN-10-1, Source=ISG0613N04NM6H.SchLib
Q4 Q5: library part CMP-00000-5, "Power MOSFET, N Channel, 60 V, 180 A, 0.0012 ohm, TO-263 (D2PAK), Surface Mount", Case/Package=TO-263-7, Continuous Drain Current (ID)=34A, Drain to Source Breakdown Voltage=60V, Drain to Source Resistance=1.4mΩ, Gate to Source Voltage (Vgs)=20V, Max Power Dissipation=214W, Drain to Source Voltage (Vdss)=60V
R1 R2 R3 R4 R5: library part CMP-009-00183-1, "Thick Film Resistors - SMD RMC 1206 1/4W 1% T/R-5000", Case/Package=1206, JLCPN=C17888
R6: library part CMP-009-00182-2, "Fixed Resistor, Metal Strip, 5W, 1ohm, 0.0707V, 1% +/-Tol, 100ppm/Cel, Surface Mount, 2512", Max Operating Temperature=170°C, Min Operating Temperature=-55°C, Tolerance=1%, Mounting Technology="Surface Mount"
R7 R8 R9 R10 R11 R12 R13 R15: library part CMP-009-00184-2, "Res Thick Film 1206 10K Ohm 1% 0.25W(1/4W) ±100ppm/C Pad SMD T/R", Case/Package=1206, JLCPN=C17902
R14 R16: library part CMP-009-00185-1, "Fixed Resistor, Metal Glaze/thick Film, 0.25W, 100000ohm, 200V, 1% +/-Tol, 100ppm/Cel, Surface Mount, 1206", Max Operating Temperature=155°C, Min Operating Temperature=-55°C, Tolerance=1%, Mounting Technology="Surface Mount"
R17: library part CMP-009-00188-1, "125mW Thick Film Resistors 150V ±100ppm/℃ ±1% 43kΩ 0805 Chip Resistor - Surface Mount ROHS", Case/Package=0805, JLCPN=C17695, Power=125mW, Tolerance=1%
R18: library part CMP-009-00178-1, "Fixed Resistor, Wire Wound, 3W, 10ohm, 5.4772V, 5% +/-Tol, 20ppm/Cel, Through Hole Mount", Case/Package=Axial, Max Operating Temperature=250°C, Min Operating Temperature=-65°C, Power Dissipation=3W, Tolerance=5%
U1: library part CMP-004-000000-6, "85-V 16-bit I²C-output digital power monitor with 400-ÂµOhm EZShunt Technology 15-VQFN -40 to 125", Case/Package=VQFN, Manufacturer_Name="Texas Instruments", Manufacturer_Part_Number=PINA780BIDEKR, Copyright="Copyright (C) 2025 Ultra Librarian. All rights reserved.", Datasheet=https://www.ti.com/lit/gpn/ina780b, Design Item ID=PINA780BIDEKR, Pins=15, RefDes=RefDes, Source=PINA780BIDEKR.SchLib, Type=Linear
U2: library part CMP-00024-00008-3, "Driver 6A 2-OUT High Side/Low Side Half Brdg Inv/Non-Inv 12-Pin MSOP EP Tube"
U3: library part CMP-014-00003-4, "SP Amp Current Sense Amp Single 5.5V 8-Pin SOIC N Tube Automotive AEC-Q100", JLCPN=C20047590, MPN=AD8411AWBRZ
U4: library part CMP-016-00010-2, "Ultra-Low Power, Bidirectional I2C Isolator with Extended VDD, Idle-Bus Hot-Swap and Low VOL", JLCPN=C44197888, MPN=ADUM1252AWA+
U5: library part CMP-015-00009-2, "Digital Isolator CMOS 4-CH 10Mbps 16-Pin SOIC W Tube / DGTL ISO 3.75KV GEN PURP 16SOIC", Case/Package=SOIC, JLCPN=C660417, Max Operating Temperature=105°C, Max Supply Voltage=5.5V, Min Operating Temperature=-40°C, Min Supply Voltage=2.7V, Pins=16
U6: library part CMP-014-00002-3, "High Stability Isolated Error Amplifier", Case/Package=QSOP, Max Operating Temperature=85°C, Max Supply Voltage=20V, Min Operating Temperature=-40°C, Min Supply Voltage=3V, Mounting Technology="Surface Mount", MPN=ADUM3190BRQZ, Pins=16
U7 U8: library part CMP-019-00051-2, "SIMPLE SWITCHER® 3.8V to 36V, 3A Synchronous Buck Converter With Ultra-Low EMI 8-SO PowerPAD -40 to 125", Max Operating Temperature=125°C, Max Supply Voltage=36V, Min Operating Temperature=-40°C, Min Supply Voltage=3.8V, Nominal Supply Current=24µA, Output Current=3A, Pins=8, Topology=Buck
U9: library part CMP-00024-00007-2, "RoHS Compliant PRODUCTION (Last Updated: 2weeks ago) MSOP IC Gate Driver", Case/Package=MSOP, Pins=10

## Via types
v1: diameter 0.6, hole 0.3, Top Layer to Bottom Layer, 12 vias

## Nets (pads, with @x,y where several pads share a name; then routed paths per layer and width w, separated by ;. In a path a pad name is that pad's centre, name@x,y a point inside that pad or via, vN(x,y) a via of type N, cw(c..) or ccw(c..) an arc to the next point about the centre after c; other vN are vias at no path point)
+3V3: C41.1 C42.1 C53.2 C54.2 C56.2 C58.2 C74.2 C75.2 C76.2 L2.2 R1.2 R2.2 R8.2 R10.2 R12.2 R16.2 U1.12 U3.6 U4.8 U5.16 U6.16 | length 8.1
  Top Layer w0.5: U3.6 123.094,39.154 123.954,39.154 124.375,39.575 124.375,46.149 C41.1
"+3V3 ISO": C52.2 C55.2 C59.2 J1.2A J1.2B R9.2 R11.2 R13.2 U4.1 U5.1 U6.1
+11V: C25.2 C65.2 C66.2 C67.2 C68.2 C69.2 C72.2 C73.2 D1.2 D2.2 J1.12A J1.12B L1.2 R14.2 U2.5 U2.6 U8.2 U8.3 U9.1
\F\A\U\L\T\: R12.1 U1.11 U2.3 U5.11
AGND: C1.2 C2.1 C3.2 C4.2 C5.1 C6.2 C7.2 C8.1 C9.2 C10.2 C11.1 C12.2 C14.2 C15.1 C16.2 C17.2 C18.2 C19.1 C20.2 C21.2 C22.2 C23.1 C24.2 C25.1 C26.2 C27.2 C28.1 C29.2 C30.2 C31.1 C32.2 C33.2 C34.2 C35.1 C36.2 C37.2 C38.2 C39.1 C40.2 C43.2 C44.1 C45.2 C46.2 C47.1 C48.2 C49.2 C50.1 C51.2 C62.1 C63.1 C64.1 C65.1 C66.1 C67.1 C68.1 C69.1 C70.1 C72.1 C73.1 C74.1 C75.1 C76.1 C77.1 J1.11A J1.11B MP1.1 Q2.1 Q2.2 Q2.3 Q3.8 Q3.9 R3.2 R4.1 R5.1 R7.1 R15.1 R17.1 U1.13 U2.7 U2.13 U7.1 U7.9 U8.1 U8.9 U9.2 U9.3 U9.5 U9.11
  other v1: 156.504,40.745 157.604,40.745 164.158,40.807 165.258,40.807 156.504,41.845 157.604,41.845 164.158,41.907 165.258,41.907 156.504,42.945 157.604,42.945 164.158,43.007 165.258,43.007
BG: Q2.4 Q3.10 U2.8
DGND: C41.2 C42.2 C53.1 C54.1 C56.1 C57.1 C58.1 R3.1 U3.2 U3.3 U4.5 U5.9 U5.10 U5.15 U6.9 U6.15 | length 9.1
  Top Layer w0.5: C41.2 127.225,46.149 C42.2 127.225,40.01 128.1,39.135 U3.3 U3.2
G_soft: Q5.1 U9.6 U9.7
"GND ISO": C52.1 C55.1 C59.1 C60.1 J1.1A J1.1B U4.4 U5.2 U5.7 U5.8 U6.2 U6.8
NetC13_2: C13.2 D1.1 U2.12
NetC57_2: C57.2 U6.14
NetC60_2: C60.2 U6.3
NetC61_1: C61.1 U7.7
NetC61_2: C61.2 L1.1 U7.8
NetC70_2: C70.2 U7.6
NetC71_1: C71.1 U8.7
NetC71_2: C71.2 L2.1 U8.8
NetC77_2: C77.2 U8.6
NetC78_2: C78.2 C79.2 D2.1 U9.9
NetJ1_3: J1.3A J1.3B U6.7
NetJ1_4: J1.4A J1.4B U5.5
NetJ1_5: J1.5A J1.5B U5.4
NetJ1_6: J1.6A J1.6B U5.3
NetJ1_7: J1.7A J1.7B U5.6
NetJ1_8: J1.8A J1.8B R11.1 U4.3
NetJ1_9: J1.9A J1.9B R9.1 U4.2
NetJ1_10: J1.10A J1.10B
NetMP2_1: MP2.1 U1.14 U1.15
NetMP3_1: MP3.1 R6.2 U3.1 | length 8.8
  Top Layer w0.5: R6.2 126.8,31.2 126.4,31.6 126.4,35.8 127.195,36.595 U3.1
NetR1_1: R1.1 R4.2 U1.4
NetR2_1: R2.1 R5.2 U1.3
NetR7_2: R7.2 U2.4
NetR13_1: R13.1 U6.6
NetR14_1: R14.1 R15.2 U7.5
NetR16_1: R16.1 R17.2 U8.5
NetU1_1: U1.1 U1.2
NetU1_9: U1.9 U1.10
NetU2_1: U2.1 U5.14
NetU2_2: U2.2 U5.13
NetU3_5: U3.5 U6.12
NetU3_7: U3.7 U6.13
NetU5_12: U5.12 U9.4
NetU6_10: U6.10 U6.11
P_IN: C1.1 C2.2 C3.1 C4.1 C5.2 C6.1 C7.1 C8.2 C9.1 C10.1 C11.2 C12.1 C14.1 C15.2 C16.1 C17.1 C18.1 C19.2 C20.1 C21.1 C22.1 C23.2 C24.1 C26.1 C27.1 C28.2 C29.1 C30.1 C31.2 C32.1 C33.1 C34.1 C35.2 C36.1 C37.1 C38.1 C39.2 C40.1 C43.1 C44.2 C45.1 C46.1 C47.2 C48.1 C49.1 C50.2 C51.1 C78.1 C79.1 Q1.5 Q3.6 Q3.7 Q4.2 Q4.3 Q4.5 Q4.6 Q4.7 Q5.2 Q5.3 Q5.5 Q5.6 Q5.7 R18.1 U9.8
SCL: R10.1 U1.6 U4.6
SDA: R8.1 U1.5 U4.7
SW: C13.1 Q1.1 Q1.2 Q1.3 Q2.5 Q3.1 Q3.2 Q3.3 Q3.4 R6.1 U2.10 U3.8 | length 8.9
  Top Layer w0.5: U3.8 124.605,36.595 125.3,35.9 125.3,31.8 124.7,31.2 R6.1
TG: Q1.4 Q3.5 U2.11
VBat: C62.2 C63.2 C64.2 Q4.8 Q5.8 R18.2 U1.8 U7.2 U7.3
pads on no net: Q4.1 Q4.4 Q5.4 U1.7 U2.9 U3.4 U6.4 U6.5 U7.4 U8.4 U9.10
copper on no net: | length 0.9
  Top Layer w0.381: 47.991,-75.683 47.991,-74.733

## Text inside footprints (layer, text, board x,y; h text height)
C17: Top Overlay "+" at 37.262,62.015 h1.52 r90; Top Overlay "-" at 47.93,61.888 h1.52 r90; Bottom Overlay "+" at 37.262,62.015 h1.52 r90; Bottom Overlay "-" at 47.93,61.888 h1.52 r90
C21: Top Overlay "+" at 71.794,44.657 h1.52 r270; Top Overlay "-" at 61.126,44.784 h1.52 r270; Bottom Overlay "+" at 71.794,44.657 h1.52 r270; Bottom Overlay "-" at 61.126,44.784 h1.52 r270
C26: Top Overlay "+" at 37.263,38.261 h1.52 r90; Top Overlay "-" at 47.931,38.134 h1.52 r90; Bottom Overlay "+" at 37.263,38.261 h1.52 r90; Bottom Overlay "-" at 47.931,38.134 h1.52 r90
C33: Top Overlay "+" at 71.779,20.73 h1.52 r270; Top Overlay "-" at 61.111,20.857 h1.52 r270; Bottom Overlay "+" at 71.779,20.73 h1.52 r270; Bottom Overlay "-" at 61.111,20.857 h1.52 r270
C37: Top Overlay "+" at 37.234,14.507 h1.52 r90; Top Overlay "-" at 47.902,14.38 h1.52 r90; Bottom Overlay "+" at 37.234,14.507 h1.52 r90; Bottom Overlay "-" at 47.902,14.38 h1.52 r90
J1: Top Overlay "1" at 8.253,51.245 h1.52 r270; Bottom Overlay "1" at 8.253,50.753 h1.52 r270